# Altium PCB MONOPLACA BORRADOR.PcbDoc
Units mil, origin at the board's own origin, x right, y up, seen from the top; angles counter-clockwise.
Board outline 7874.02 x 3543.31 mil, 2 copper layers (Top Layer, Bottom Layer); 53 components, 35 nets, 154 pads, 8 vias.
Unrouted connection lines stored in the file: 14.
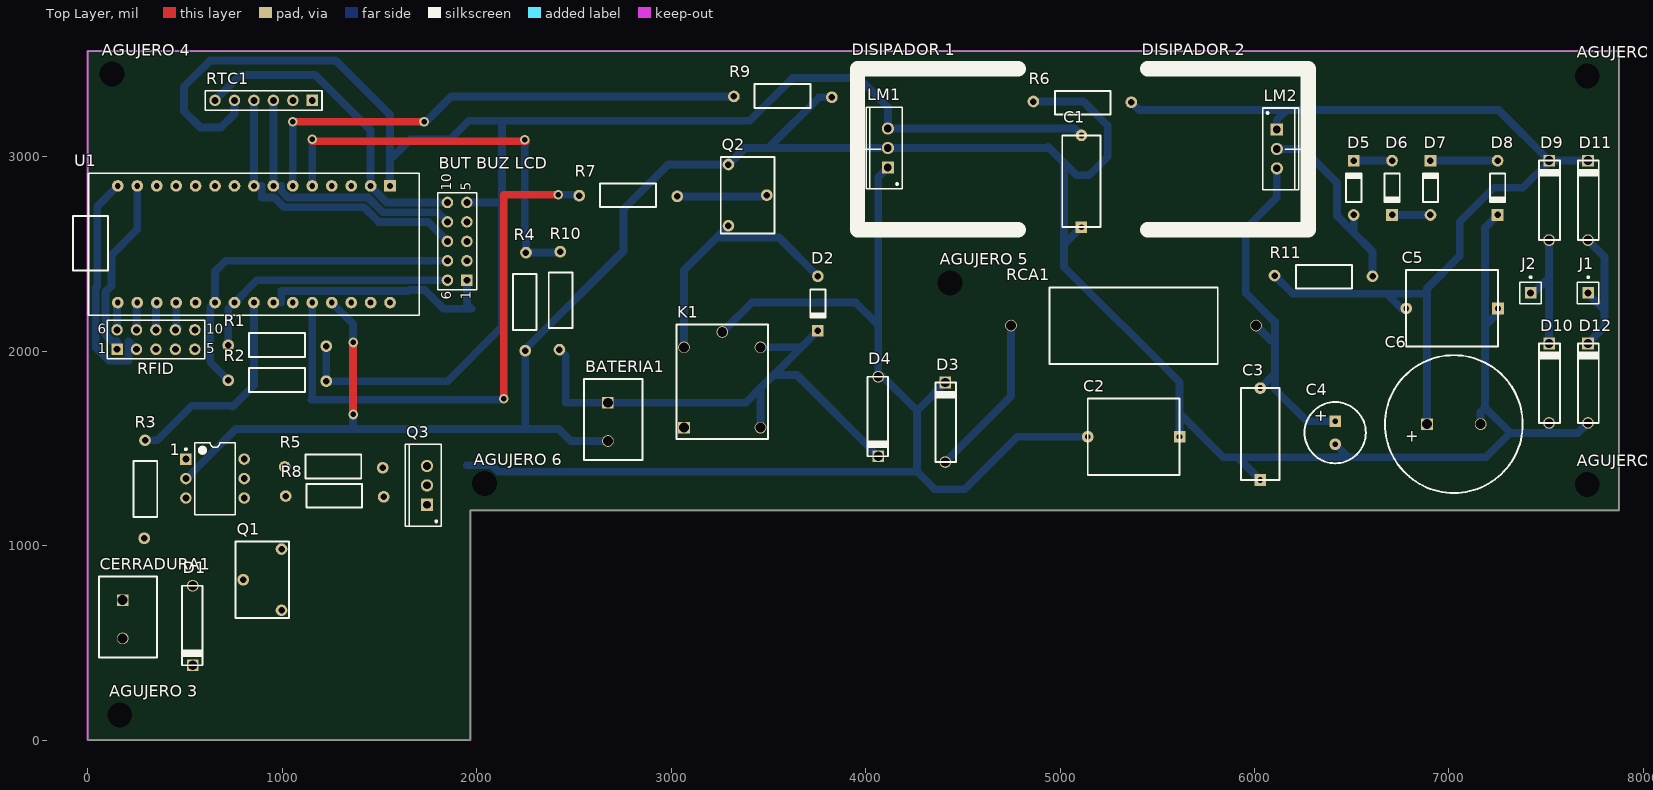
[diagram p0: Top Layer view]
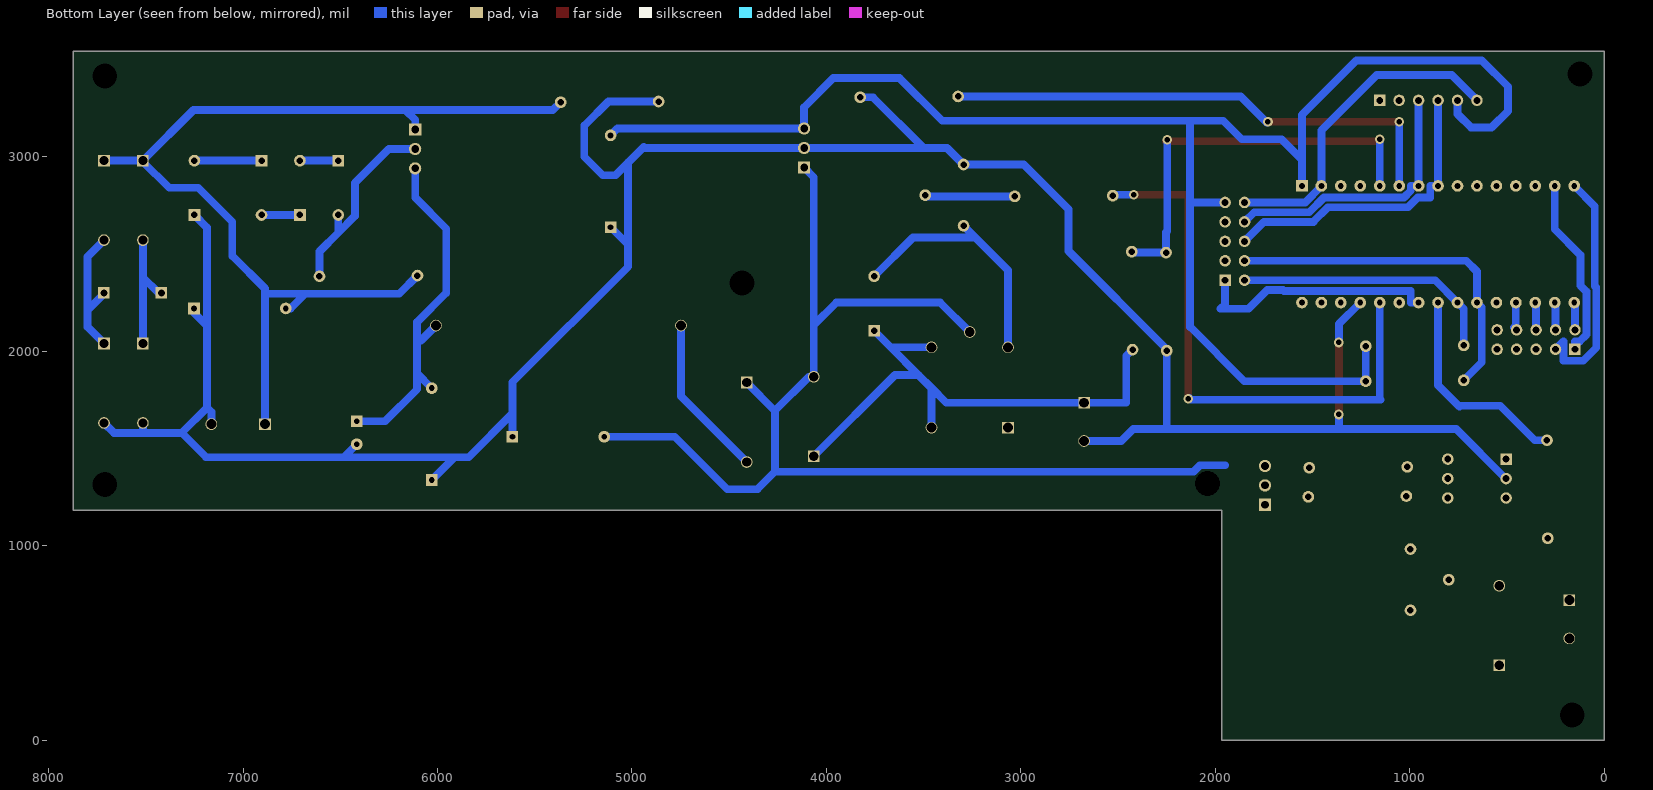
[diagram p1: Bottom Layer view, seen from below]
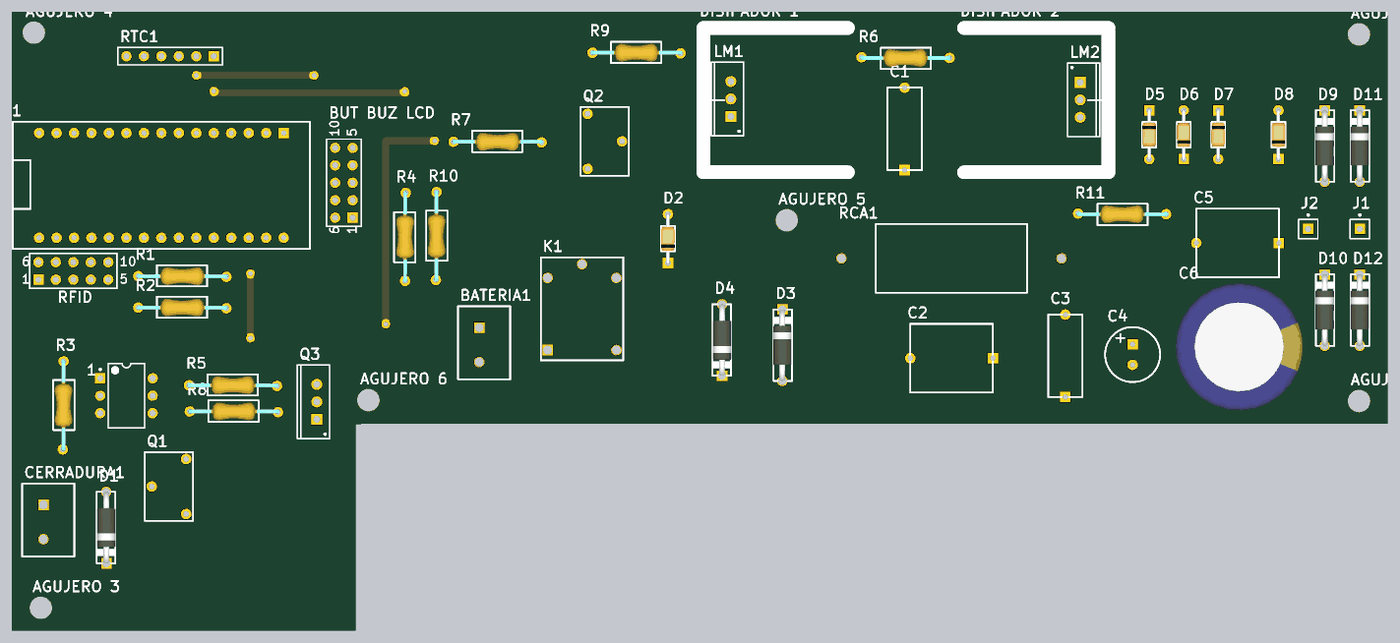
[diagram p2: 3D render of the assembled board from above, using the file's embedded part models]

## Layer stack, top to bottom
Top Solder: solder mask 0.4, Solder Resist, Dk 3.5
Top Layer: signal copper 1.4
Dielectric 1: dielectric 12.6, FR-4, Dk 4.8
Bottom Layer: signal copper 1.4
Bottom Solder: solder mask 0.4, Solder Resist, Dk 3.5

## Board outline
0,0 1968.5,0 1968.5,1181.1 7874.02,1181.1 7874.02,3543.31 0,3543.31

## Design rules (kind name [scope] priority, off if disabled: settings)
Clearance [All] p1: gap=10 ignorepadtopadclearanceinfootprint=FALSE except(0: Arc-Hole Track-Hole SMDPad-Hole THPad-Hole Via-Hole Fill-Hole Poly-Hole Region-Hole Text-Hole)
PolygonConnect [All] p1: connectstyle=Relief reliefconductorwidth=10 reliefentries=4 polygonreliefangle="90 Angle" airgapwidth=10
RoutingVias [All] p1: holewidth=28 width=50 viastyle="Through Hole" minholewidth=28 minwidth=50 maxholewidth=28 maxwidth=50
SolderMaskExpansion [All] p1: expansion=4
Width [All] p1: maxlimit=40 minlimit=40 preferedwidth=40
30 further rules are at their usual default settings.

## Components (designator, comment, footprint, x,y, rotation, side; value= is the part's Value field where it differs from the comment)
1 "4N25" DIP-6 655,1345 r0 top
"AGUJERO 1" "agujero" "AGUJERO MONTAJE 3.25 mm" 7711.06,3415 r90 top
"AGUJERO 2" "agujero" "AGUJERO MONTAJE 3.25 mm" 7711.06,1315 r90 top
"AGUJERO 3" "agujero" "AGUJERO MONTAJE 3.25 mm" 165,130 r90 top
"AGUJERO 4" "agujero" "AGUJERO MONTAJE 3.25 mm" 125,3425 r90 top
"AGUJERO 5" "agujero" "AGUJERO MONTAJE 3.25 mm" 4435,2350 r90 top
"AGUJERO 6" "agujero" "AGUJERO MONTAJE 3.25 mm" 2040,1320 r90 top
BATERIA1 "Header 2" "Bornera 2 pin" 2852.17,1857.05 r270 top
"BUT BUZ LCD" "Header 5X2A" HDR2X5_CEN 1950,2365 r90 top
C1 "Cap" "CAP 5x12 mm" 5110,2637.56 r90 top value="0.1 uf"
C2 "Cap" "CAP 12x10 mm" 5615,1560 r180 top value="0.47 uf"
C3 "Cap" "CAP 5x12 mm" 6030,1337.56 r90 top value="0.1 uf"
C4 "Cap Pol1" "CAP POL 3 - 8 mm" 6415,1640 r90 top value="220 uf"
C5 "Cap" "CAP 12x10 mm" 7252.44,2220 r180 top value="0.47 uf"
C6 "Cap Pol1" "CAP POL 18x7 mm" 7025,1625 r180 top value="2200 uf"
CERRADURA1 "Header 2" "Bornera 2 pin" 357.17,842.05 r270 top
D1 "1N5819" DO-41 540,793.86 r270 top
D2 "IN4148" DO-35 3755,2385 r270 top
D3 "1N5819" DO-41 4410,1430 r90 top
D4 "1N4007" DO-41 4065,1868.86 r270 top
D5 "Diode 1N914" DO-35 6510,2700.47 r90 top
D6 "Diode 1N914" DO-35 6707.5,2980 r270 top
D7 "Diode 1N914" DO-35 6905,2700.47 r90 top
D8 "Diode 1N4148" DO-35 7250,2980 r270 top
D9 "IN4007" DO-41 7515,2571.14 r90 top
D10 "IN4007" DO-41 7515,1631.14 r90 top
D11 "IN4007" DO-41 7715,2571.14 r90 top
D12 "IN4007" DO-41 7715,1631.14 r90 top
"DISIPADOR 1" "DISIPADOR 20 °C/W" "DISIPADOR 20 C°/W" 4785,3451.77 r270 top
"DISIPADOR 2" "DISIPADOR 20 °C/W" "DISIPADOR 20 C°/W" 5450,2625 r90 top
J1 "trafo 19V" PIN1 7715.98,2300 r0 top
J2 "trafo 19 v" PIN1 7420,2300 r0 top
K1 "Relay" RELE 3026.93,1547.56 r90 top
LM1 "LM7805" TO-220AB 4115,3045 r90 top
LM2 "LM7812" TO-220AB 6115,3040 r270 top
Q1 "BC548" TO-92-MOD 800,825 r90 top
Q2 "BC548" TO-92-MOD 3491.85,2802.48 r270 top
Q3 "TIP32" TO-220AB 1745,1310 r90 top
R1 "Res1" "RESISTENCIA 0.25 W" 975,2030 r0 top value=1K
R2 "Res1" "RESISTENCIA 0.25 W" 975,1850 r0 top value=1K
R3 "Res1" "RESISTENCIA 0.25 W" 295,1290 r270 top value=1K
R4 "Res1" "RESISTENCIA 0.25 W" 2250,2255 r90 top value=10K
R5 "Res1" "RESISTENCIA 0.25 W" 1265,1405 r0 top value=10K
R6 "Res1" "RESISTENCIA 0.25 W" 5115,3280 r180 top value=10K
R7 "Res1" "RESISTENCIA 0.25 W" 2780,2800 r0 top value=10K
R8 "Res1" "RESISTENCIA 0.25 W" 1270,1255 r0 top value=1K
R9 "Res1" "RESISTENCIA 0.25 W" 3575,3310 r0 top value=1K
R10 "Res1" "RESISTENCIA 0.25 W" 2430,2260 r270 top value=1K
R11 "Res1" "RESISTENCIA 0.25 W" 6355,2385 r180 top value=1K
RCA1 "Res1" "RESISTENCIA 5W" 4945,1935 r90 top value=11
RFID "Header 5X2A" HDR2X5_CEN 151,2010 r0 top
RTC1 "Header 6" HDR1X6 1155,3290 r180 top
U1 "Arduino Nano" "Arduino nano" 1555,2850 r270 top

## Footprints (in the part's own frame and the unit in brackets; to place one, negate y for a bottom-side part, rotate by r counter-clockwise, add the part's x,y. Pads: shape width x height; smd on the part's side, far side on the other; paste and mask are expansions set on the pad)
"AGUJERO MONTAJE 3.25 mm" [mil]
  round 60 hole 127.95: 1(0,0)
"Arduino nano" [mil]
  rect 60x60 hole 30: 1(0,0)
  round 60 hole 30: 2(0,-100) 3(0,-200) 4(0,-300) 5(0,-400) 6(0,-500) 7(0,-600) 8(0,-700) 9(0,-800) 10(0,-900) 11(0,-1000) 12(0,-1100) 13(0,-1200) 14(0,-1300) 15(0,-1400) 16(600,-1400) 17(600,-1300) 18(600,-1200) 19(600,-1100) 20(600,-1000) 21(600,-900) 22(600,-800) 23(600,-700) 24(600,-600) 25(600,-500) 26(600,-400) 27(600,-300) 28(600,-200) 29(600,-100) 30(600,0)
  silkscreen extent -65,-1630 665,150
"Bornera 2 pin" [mm]
  rect 1.524x1.524 hole 1.3: 1(3.1,-4.5)
  round 1.524 hole 1.3: 2(8.1,-4.5)
  silkscreen extent 0,-7.6 10.6,0
"CAP 5x12 mm" [mil]
  rect 60x60 hole 30: 1(0,0)
  round 60 hole 30: 2(472.44,0)
  silkscreen extent 0,-98 472,98
"CAP 12x10 mm" [mil]
  rect 60x60 hole 30: 1(0,0)
  round 60 hole 30: 2(472.44,0)
  silkscreen extent 0,-197 472,197
"CAP POL 3 - 8 mm" [mil]
  rect 60x60 hole 30: 1(0,0)
  round 60 hole 30: 2(-118.11,0)
  silkscreen extent -217,-157 98,157
"CAP POL 18x7 mm" [mil]
  rect 60x60 hole 51.18: 1(137.8,0)
  round 60 hole 51.18: 2(-137.8,0)
  silkscreen extent -354,-354 354,354, body extent -364,-364 364,364, height 1476
DIP-6 [mm] "DIP; 6 Leads; Row Spacing 7.62 mm; Pitch 2.54 mm"
  rect 1.5x1.5 hole 0.9: 1(-3.81,2.54)
  round 1.5 hole 0.9: 2(-3.81,0) 3(-3.81,-2.54) 4(3.81,-2.54) 5(3.81,0) 6(3.81,2.54)
  silkscreen extent -3.93,-4.7 2.65,4.7, body extent -3.55,-4.7 3.55,4.7, height 5.46
"DISIPADOR 20 C°/W" [mil]
  silkscreen extent 0,-827 827,0
DO-35 [mil]
  round 60 hole 33.46: 1(0,0)
  rect 60x60 hole 33.46: 2(279.53,0)
  silkscreen extent 67,-39 213,39, body extent -6,-39 289,39, height 39
DO-41 [mil]
  round 60 hole 47.24: 1(0,0)
  rect 60x60 hole 47.24: 2(408.86,0)
  silkscreen extent 0,-55 409,51, body extent 0,-53 409,53, height 111
HDR1X6 [mm] "Connector; Header; 6 Position"
  rect 1.5x1.5 hole 0.9: 1(0,0)
  round 1.5 hole 0.9: 2(2.54,0) 3(5.08,0) 4(7.62,0) 5(10.16,0) 6(12.7,0)
  silkscreen extent -1.27,-1.27 13.97,1.27
HDR2X5_CEN [mm] "Connector; Header; 5x2 Position"
  rect 1.5x1.5 hole 0.9: 1(0,0)
  round 1.5 hole 0.9: 2(2.54,0) 3(5.08,0) 4(7.62,0) 5(10.16,0) 6(0,2.54) 7(2.54,2.54) 8(5.08,2.54) 9(7.62,2.54) 10(10.16,2.54)
  silkscreen extent -1.27,-1.27 11.43,3.81
PIN1 [mm] "Connector; Plug"
  rect 1.5x1.5 hole 0.9: 1(0,0)
  silkscreen extent -1.4,-1.4 1.4,2.17
RELE [mm]
  rect 1.524x1.524 hole 1.3: 1(1.5,-1)
  round 1.524 hole 1.3: 2(1.5,-11) 3(12,-1) 4(12,-11) 5(14,-6)
  silkscreen extent 0,-12 15,0
"RESISTENCIA 0.25 W" [mm]
  round 1.524 hole 0.85: 1(-6.4,0) 2(6.4,-0.1)
  silkscreen extent -3.7,-1.5 3.6,1.6, body extent -6.63,-1.27 6.63,1.27, height 2.54
"RESISTENCIA 5W" [mm]
  round 1.524 hole 1.3: 1(5,5) 2(5,-27)
  silkscreen extent 0,-22 10,0
TO-92-MOD [mm]
  round 1.524 hole 0.85: 1(4,-5) 2(0,0) 3(-4,-5)
  silkscreen extent -5,-6 5,1
TO-220AB [mm] "TO, Thru-Hole, Vertical, Heatsink Mounted; 3 In-Line Leads; Pitch 2.54 mm"
  rect 1.6x1.6 hole 1: 1(-2.54,0)
  round 1.6 hole 1: 2(0,0) 3(2.54,0)
  silkscreen extent -5.35,-1.85 5.35,2.85, body extent -5.4,-1.9 5.4,2.9, height 19.3

## Part data
1: library part Optoisolator1, "4-Pin Phototransistor Optocoupler", DatasheetVersion=Nov-2003, LatestRevisionDate=04-Mar-2005, LatestRevisionNote="Sch pins 3 & 4 Swapped.", PackageReference=DIP-4, Published=24-Mar-1999, Publisher="Altium Limited"
"AGUJERO 1" "AGUJERO 2" "AGUJERO 3" "AGUJERO 4" "AGUJERO 5" "AGUJERO 6" "DISIPADOR 1" "DISIPADOR 2" J1 J2: library part Socket, "Socket", LatestRevisionDate=17-Jul-2002, LatestRevisionNote="Re-released for DXP Platform.", Publisher="Altium Limited"
BATERIA1 CERRADURA1: "Header, 2-Pin", LatestRevisionDate=17-Jul-2002, LatestRevisionNote="Re-released for DXP Platform.", Publisher="Altium Limited"
"BUT BUZ LCD" RFID: "Header, 5-Pin, Dual row", LatestRevisionDate=17-Jul-2002, LatestRevisionNote="Re-released for DXP Platform.", Publisher="Altium Limited"
C1 C2 C3 C5: "Capacitor", LatestRevisionDate=17-Jul-2002, LatestRevisionNote="Re-released for DXP Platform.", PackageDescription="Radial Cap, Thru-Hole; 2 Leads; 0.3 in Pin Spacing", PackageReference=RAD-0.3, Published=8-Jun-2000, Publisher="Altium Limited"
C4 C6: "Polarized Capacitor (Radial)", LatestRevisionDate=17-Jul-2002, LatestRevisionNote="Re-released for DXP Platform.", PackageDescription="Polarized Capacitor (Radial); 2 Leads", PackageReference=RB7.6-15, Published=8-Jun-2000, Publisher="Altium Limited"
D1 D3: library part "D Schottky", "Schottky Diode", Code_JEDEC=DO-214-AA, LatestRevisionDate=17-Jul-2002, LatestRevisionNote="Re-released for DXP Platform.", PackageDescription="DO-214-AA/SMB; 2 C-Bend Leads; Body 5.3 x 3.6 mm, inc. leads (LxW)", PackageReference=SMB, Published=8-Jun-2000, Publisher="Altium Limited"
D2 D4 D8 D9 D10 D11 D12: library part "Diode 1N914", "High Conductance Fast Diode", Code_JEDEC=DO-204-AH, ComponentLink1Description="Manufacturer Link", ComponentLink1URL=http://www.fairchildsemi.com/, ComponentLink2Description=Datasheet, ComponentLink2URL=http://www.fairchildsemi.com/ds/1N%2F1N4448.pdf, DatasheetVersion=1997, LatestRevisionDate=17-Jul-2002, LatestRevisionNote="Re-released for DXP Platform.", PackageDescription="Diode, Axial; Body 3.8 x 1.9 mm (LxDia. max), Lead Dia. 0.53 mm (max)", PackageReference=DO-35, Published=8-Jun-2000, Publisher="Altium Limited"
D5 D6 D7: "High Conductance Fast Diode", Code_JEDEC=DO-204-AH, ComponentLink1Description="Manufacturer Link", ComponentLink1URL=http://www.fairchildsemi.com/, ComponentLink2Description=Datasheet, ComponentLink2URL=http://www.fairchildsemi.com/ds/1N%2F1N4448.pdf, DatasheetVersion=1997, LatestRevisionDate=17-Jul-2002, LatestRevisionNote="Re-released for DXP Platform.", PackageDescription="Diode, Axial; Body 3.8 x 1.9 mm (LxDia. max), Lead Dia. 0.53 mm (max)", PackageReference=DO-35, Published=8-Jun-2000, Publisher="Altium Limited"
K1: library part Relay-SPST, "Single-Pole Single-Throw Relay", LatestRevisionDate=17-Jul-2002, LatestRevisionNote="Re-released for DXP Platform.", PackageReference=MODULE4, Published=24-Mar-1999, Publisher="Altium Limited"
LM1 LM2: library part "Volt Reg", "Voltage Regulator", LatestRevisionDate=29-May-2009, LatestRevisionNote="IPC-7351 Footprint Added.", PackageDescription="3-Pin Transistor Outline Package 2.54 mm Pitch, 15.1 mm Lead Span", PackageReference=D2PAK, Published=24-Mar-1999, Publisher="Altium Limited"
Q1: library part 2N3904, "NPN General Purpose Amplifier", ComponentLink1Description="Manufacturer Link", ComponentLink1URL=http://www.fairchildsemi.com/, ComponentLink2Description=Datasheet, ComponentLink2URL=http://www.fairchildsemi.com/ds/2N%2F2N3904.pdf, DatasheetVersion=1997, LatestRevisionDate=15-Jan-2003, LatestRevisionNote="PCB Footprint 'BCY-W3/D4.7' replaced", PackageDescription="TO, Flat Index; 3 In-Line, Axial Leads; Body Dia. 4.5mm; Leads 0.51 x 0.48 mm (max)", PackageReference=TO-92A, PackageVersion=Sep-1998, Published=8-Jun-2000, Publisher="Altium Limited"
Q2: library part NPN, "NPN Bipolar Transistor", Code_JEDEC=TO-226-AA, LatestRevisionDate=17-Jul-2002, LatestRevisionNote="Re-released for DXP Platform.", PackageDescription="TO, Flat Index; 3 In-Line, Axial Leads; Body Dia. 4.8mm; Leads 0.55 x 0.51 mm (max)", PackageReference=TO-226-AA, Published=8-Jun-2000, Publisher="Altium Limited"
Q3: library part 2N3906, "PNP General Purpose Amplifier", ComponentLink1Description="Manufacturer Link", ComponentLink1URL=http://www.fairchildsemi.com/, ComponentLink2Description=Datasheet, ComponentLink2URL=http://www.fairchildsemi.com/ds/2N%2F2N3906.pdf, DatasheetVersion=1997, LatestRevisionDate=15-Jan-2003, LatestRevisionNote="PCB Footprint 'BCY-W3/D4.7' replaced", PackageDescription="TO, Flat Index; 3 In-Line, Axial Leads; Body Dia. 4.5mm; Leads 0.51 x 0.48 mm (max)", PackageReference=TO-92A, PackageVersion=Sep-1998, Published=8-Jun-2000, Publisher="Altium Limited"
R1 R2 R3 R4 R5 R6 R7 R8 R9 R10 R11 RCA1: "Resistor", LatestRevisionDate=17-Jul-2002, LatestRevisionNote="Re-released for DXP Platform.", PackageDescription="Axial Device, Thru-Hole; 2 Leads; 0.3 in Pin Spacing", PackageReference=AXIAL-0.3, Published=8-Jun-2000, Publisher="Altium Limited"
RTC1: "Header, 6-Pin", LatestRevisionDate=17-Jul-2002, LatestRevisionNote="Re-released for DXP Platform.", Publisher="Altium Limited"
U1: library part Component_1

## Via types
v1: diameter 50, hole 28, Top Layer to Bottom Layer, 8 vias

## Nets (pads, with @x,y where several pads share a name; then routed paths per layer and width w, separated by ;. In a path a pad name is that pad's centre, name@x,y a point inside that pad or via, vN(x,y) a via of type N, cw(c..) or ccw(c..) an arc to the next point about the centre after c; other vN are vias at no path point)
5V: "BUT BUZ LCD.5" C1.2 LM1.3 R1.2 R2.2 RTC1.5 U1.1 | length 8472.3
  Bottom Layer w40: RTC1.5 755,3220 685,3150 580,3150 495,3235 495,3360 630,3495 1275,3495 1555,3215 1555,2985 ; R1.2 R2.2 1851.06,1846.06 2130,2125 2130,2770 ; U1.1 1555,2985 ; 1950,2765 2125,2765 2130,2770 ; C1.2 5075,3145 LM1.3 4115,3255 3965,3405 3625,3405 3405,3185 2130,3185 ; 1555,2985 1660,3090 1865,3090 1960,3185 2130,3185 ; 2130,2770 2130,3185
"13,8 V": BATERIA1.1 D2.2 D4.2 K1.2 K1.4 R10.2 | length 2860.9
  Bottom Layer w40: R10.2 2458.03,1976.06 2458.03,1735 BATERIA1.1 3384.53,1735 3460,1810.47 ; K1.2 3460,1810.47 ; K1.4 3669.53,2020 ; D2.2 3669.53,2020 ; D4.2 3647.26,1877.74 3527.26,1877.74 ; 3460,1810.47 3527.26,1877.74 ; 3527.26,1877.74 3669.53,2020
"14,5 V": C2.2 D3.2 D4.1 K1.5 LM1.1 Q3.3 R5.2 | length 6155.1
  Bottom Layer w40: 1951.02,1413.98 2078.93,1413.98 2112.9,1380 4265,1380 ; K1.5 3414.41,2250 3950,2250 4065,2135 ; LM1.1 4065,2895 4065,2135 ; D3.2 4265,1693.86 ; C2.2 4780,1560 4510,1290 4355,1290 4265,1380 ; 4065,2135 D4.1 4090,1868.86 4265,1693.86 ; 4265,1380 4265,1693.86
"14,8 V": C3.2 C4.1 LM2.3 RCA1.2 | length 1876.7
  Bottom Layer w40: RCA1.2 6084.84,2055 6105,2055 ; C3.2 6105,1885 ; LM2.3 6115,2790 5955,2630 5955,2300 6105,2150 6105,2055 ; C4.1 6270,1640 6105,1805 6105,1885 ; 6105,1885 6105,2055
GND: 1.2 "BUT BUZ LCD.10" BATERIA1.2 C1.1 C2.1 C3.1 C4.2 C5.1 C6.2 CERRADURA1.1 D1.1 D8.2 D10.1 D12.1 LM1.2 Q1.3 Q2.3 R4.1 R6.2 R9.2 RTC1.6 U1.2 U1.27 | length 15556.1
  Top Layer w40: v1(1365,1675) v1(1365,2045)
  Bottom Layer w40: 1.2 506.48,1345 761.48,1600 1355,1600 ; RTC1.6 785,3420 1170,3420 1455,3135 U1.2 1455,2847.57 1537.57,2765 1850,2765 ; U1.27 1365,2140 v1(1365,2045) ; v1(1365,1675) 1365,1610 1355,1600 ; BATERIA1.2 2483.82,1538.15 2421.97,1600 2245,1600 ; R9.2 3761.06,3306.06 3500,3045 ; R6.2 5121.06,3283.94 5245,3160 5245,3000 5150,2905 5085,2905 5020,2970 ; C1.1 5020,2547.56 ; C2.1 5615,1680 ; C3.1 5912.56,1455 ; C4.2 6481.89,1455 ; C6.2 7162.8,1687.8 7185,1710 ; D8.2 7185,2635.47 7185,2130 ; C5.1 7252.44,2197.44 7185,2130 ; D10.1 7515,1580 ; D12.1 7663.86,1580 7515,1580 ; 1355,1600 2245,1600 ; 2245,1600 2250,1605 R4.1 2250,2010 2755,2515 2755,2729.92 2985.04,2959.96 Q2.3 3380.04,3045 3500,3045 ; 3500,3045 LM1.2 4935,3045 4940,3050 5020,2970 ; 5020,2547.56 5020,2970 ; 5020,2547.56 5020,2435 5615,1840 5615,1680 ; 5615,1680 5840,1455 5912.56,1455 ; 5912.56,1455 6481.89,1455 ; 6481.89,1455 7190,1455 7315,1580 ; 7185,1710 7315,1580 ; 7185,1710 7185,2130 ; 7315,1580 7515,1580
Net1_1: 1.1 R3.2
Net1_3: 1.4 Q1.2
Net1_4: 1.5 Q1.1 R5.1 R8.1
"NetBUT BUZ LCD_1": "BUT BUZ LCD.6" R1.1 U1.22 | length 1375.9
  Bottom Layer w40: R1.1 723.03,2218.03 U1.22 870,2365 1850,2365
"NetBUT BUZ LCD_2": "BUT BUZ LCD.7" R2.1 U1.21 | length 1826.7
  Bottom Layer w40: R2.1 630,1943.03 630,2225 U1.21 655,2410 710,2465 1850,2465
"NetBUT BUZ LCD_3": "BUT BUZ LCD.1" U1.24 | length 1278.2
  Bottom Layer w40: U1.24 995,2250 995,2310 1647,2310 1652,2315 1733,2315 1830,2218 1974,2218 1950,2242 1950,2365
NetC5_2: C5.2 C6.1 D9.2 D11.2 LM2.1 R6.1 R11.2 | length 5250.1
  Bottom Layer w40: R6.1 5406.97,3240 6165,3240 ; R11.2 6196.97,2295 6680,2295 ; LM2.1 6115,3190 6165,3240 ; C5.2 6755,2220 6680,2295 ; C6.1 6887.2,2295 ; D11.2 D9.2 ; 6165,3240 7255,3240 D9.2 ; 6680,2295 6887.2,2295 ; 6887.2,2295 6887.2,2322.2 7055,2490 7055,2665 7230,2840 7380,2840 7515,2975 D9.2
NetCERRADURA1_1: CERRADURA1.2 D1.2 Q3.2
NetD2_1: D2.1 K1.3 Q2.1 | length 1322.6
  Bottom Layer w40: K1.3 3066.3,2416.3 3235,2585 ; Q2.1 3235,2585 ; D2.1 3555,2585 3235,2585
NetD3_1: D3.1 RCA1.1 | length 841.9
  Bottom Layer w40: D3.1 4748.15,1768.15 RCA1.1
NetD5_1: D5.1 LM2.2 R11.1 | length 1028.3
  Bottom Layer w40: LM2.2 6250,3040 6425,2865 6425,2695 6510,2610 ; D5.1 6510,2610 ; R11.1 6606.97,2513.03 6510,2610
NetD5_2: D5.2 D6.1 | length 197.5
  Bottom Layer w40: D5.2 D6.1
NetD6_2: D6.2 D7.1 | length 197.5
  Bottom Layer w40: D6.2 D7.1
NetD7_2: D7.2 D8.1 | length 345
  Bottom Layer w40: D7.2 D8.1
NetD9_1: D9.1 D10.2 J2.1 | length 659.3
  Bottom Layer w40: J2.1 7435,2300 7515,2380 ; D10.2 7515,2380 ; D9.1 7515,2380
NetD11_1: D11.1 D12.2 J1.1 | length 726.4
  Bottom Layer w40: D12.2 7800,2125 7800,2210 ; D11.1 7800,2486.14 7800,2210 ; J1.1 7715.98,2294.02 7800,2210
NetQ2_2: Q2.2 R7.2 | length 462.5
  Bottom Layer w40: R7.2 3485.43,2796.06 Q2.2
NetQ3_2: Q3.1 R8.2
NetR3_1: R3.1 U1.23 | length 1106.4
  Bottom Layer w40: R3.1 356.97,1541.97 535,1720 740,1720 745,1715 855,1825 U1.23
NetR4_2: R4.2 R10.1 U1.5 | length 2123.4
  Top Layer w40: v1(1155,3090) 1155,3080 2255,3080 2248,3087 v1(2248,3088)
  Bottom Layer w40: U1.5 v1(1155,3090) ; v1(2248,3088) 2248,2617 2255,2610 2253.94,2608.94 R4.2 2425,2506.97 R10.1
NetRFID_1: RFID.8 U1.18 | length 141.7
  Bottom Layer w40: RFID.8 351,2246 U1.18
NetRFID_2: RFID.9 U1.19 | length 149.7
  Bottom Layer w40: RFID.9 452,2110 464,2122 455,2131 U1.19
NetRFID_6: RFID.1 U1.14 | length 946.8
  Bottom Layer w40: RFID.1 151,2050.47 126.34,2050.47 91.47,2085.34 91.47,2306.47 123,2338 123,2495 255,2627 U1.14
NetRFID_7: RFID.2 U1.15 | length 1233.3
  Bottom Layer w40: U1.15 49,2744 49,2334.71 41.47,2327.18 41.47,2018.05 109.05,1950.47 210.53,1950.47 210.53,2050.47 RFID.2
NetRFID_8: RFID.6 U1.16 | length 141.7
  Bottom Layer w40: RFID.6 151,2246 U1.16
NetRFID_9: RFID.7 U1.17 | length 141.7
  Bottom Layer w40: RFID.7 251,2246 U1.17
RELAY: R7.1 U1.26 | length 2938.4
  Top Layer w40: v1(2140,1755) 2140,2805 v1(2420,2805)
  Bottom Layer w40: U1.26 1155,1755 1150,1750 2125,1750 2135,1760 v1(2140,1755) ; v1(2420,2805) 2523.03,2805 R7.1
SCL: "BUT BUZ LCD.9" RTC1.3 U1.7 | length 1426.2
  Bottom Layer w40: RTC1.3 U1.7 995,2850 995,2825.15 1030.15,2790 1441.86,2790 1516.86,2715 1800,2715 1850,2665
SDA: "BUT BUZ LCD.8" RTC1.4 U1.8 | length 1588.2
  Bottom Layer w40: RTC1.4 U1.8 895,2850 895,2790 959.44,2790 1009.44,2740 1421.15,2740 1496.15,2665 1750,2665 1850,2565
"SENS 12V": R9.1 U1.6 | length 2656
  Top Layer w40: v1(1055,3180) v1(1730,3180)
  Bottom Layer w40: U1.6 v1(1055,3180) ; v1(1730,3180) 1735,3175 1870,3310 R9.1
pads on no net: 1.3 1.6 "AGUJERO 1.1" "AGUJERO 2.1" "AGUJERO 3.1" "AGUJERO 4.1" "AGUJERO 5.1" "AGUJERO 6.1" "BUT BUZ LCD.2" "BUT BUZ LCD.3" "BUT BUZ LCD.4" K1.1 RFID.3 RFID.4 RFID.5 RFID.10 RTC1.1 RTC1.2 U1.3 U1.4 U1.9 U1.10 U1.11 U1.12 U1.13 U1.20 U1.25 U1.28 U1.29 U1.30

## Keep-outs
Top Layer:
  the board outline again, w9.84

## Text inside footprints (layer, text, board x,y; h text height)
"BUT BUZ LCD": Top Overlay "6" at 1870,2265 h50 r90; Top Overlay "10" at 1870,2825 h50 r90; Top Overlay "5" at 1970,2825 h50 r90; Top Overlay "1" at 1970,2265 h50 r90
C4: Top Overlay "+" at 6367.76,1632.13 h60 r90
C6: Top Overlay "+" at 6843.9,1589.57 h60 r180
RFID: Top Overlay "6" at 51,2090 h50; Top Overlay "10" at 611,2090 h50; Top Overlay "5" at 611,1990 h50; Top Overlay "1" at 51,1990 h50